# Altium PCB encoder-layout.PcbDoc
Units mil, origin at the board's own origin, x right, y up, seen from the top; angles counter-clockwise.
Board outline 1220.47 x 1233.89 mil, 2 copper layers (Top Layer, Bottom Layer); 16 components, 13 nets, 64 pads, 19 vias.
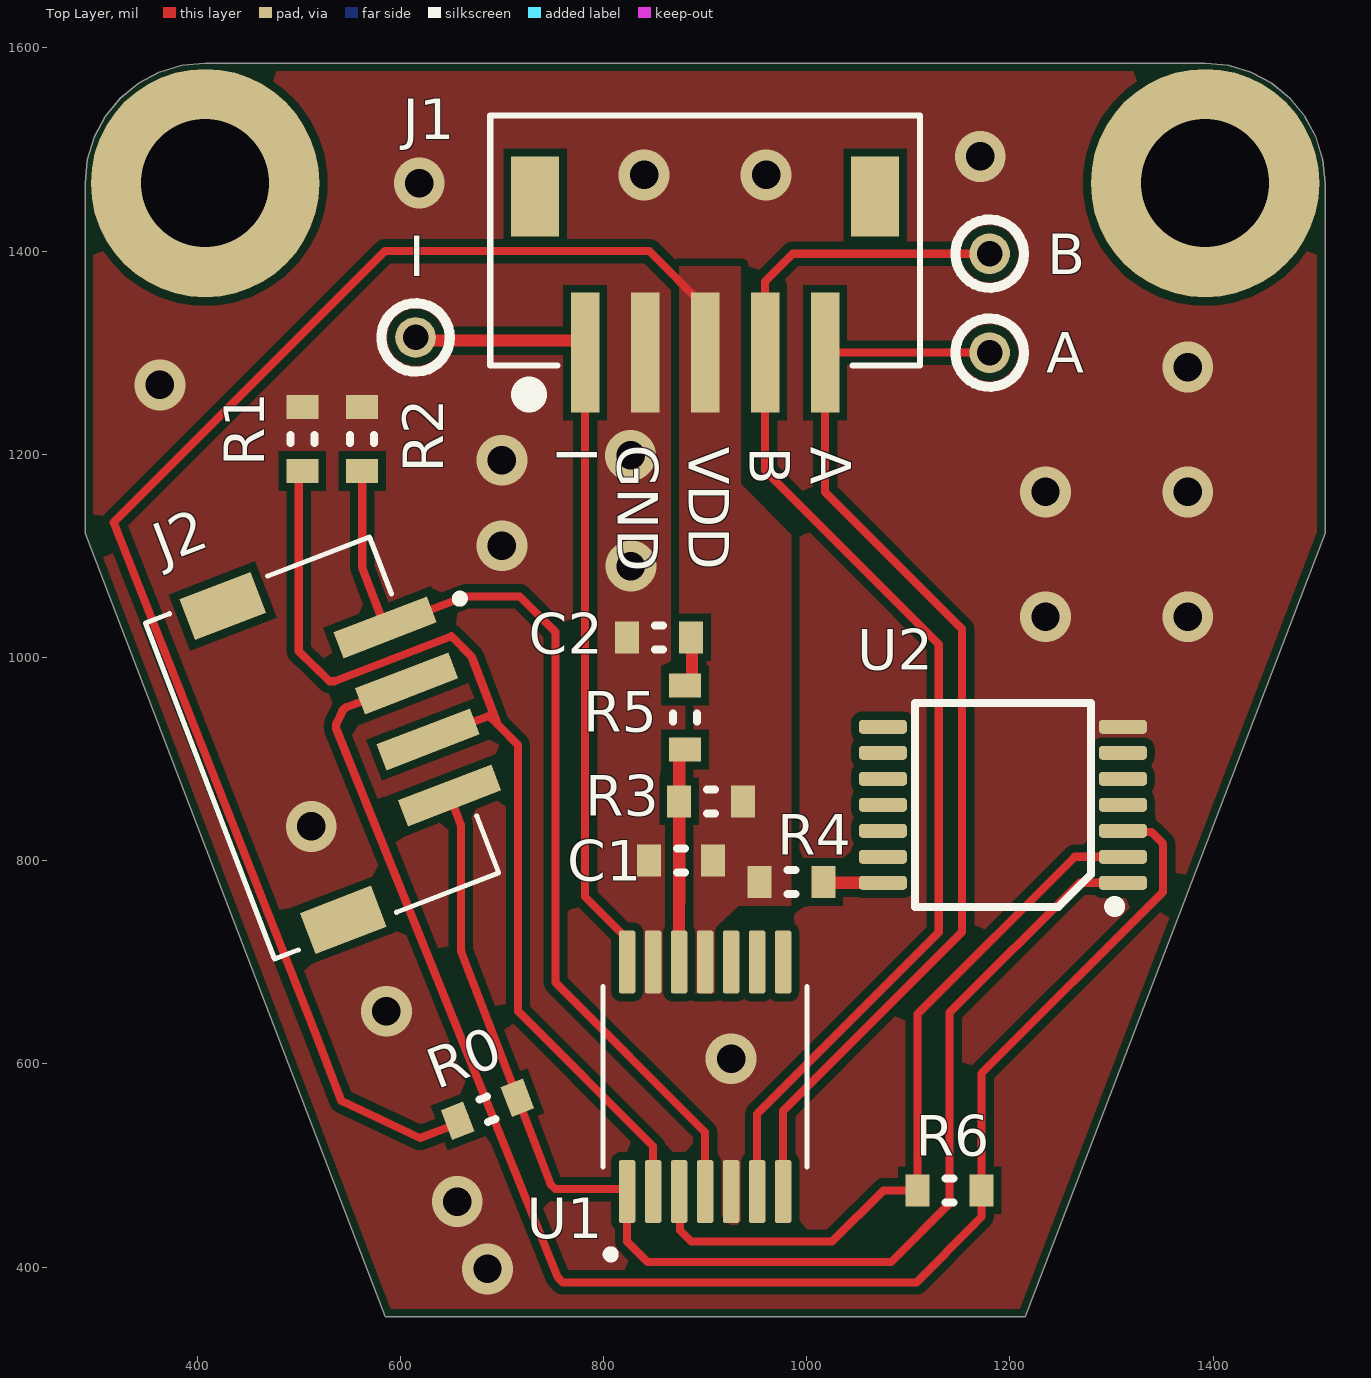
[diagram p0: Top Layer view]
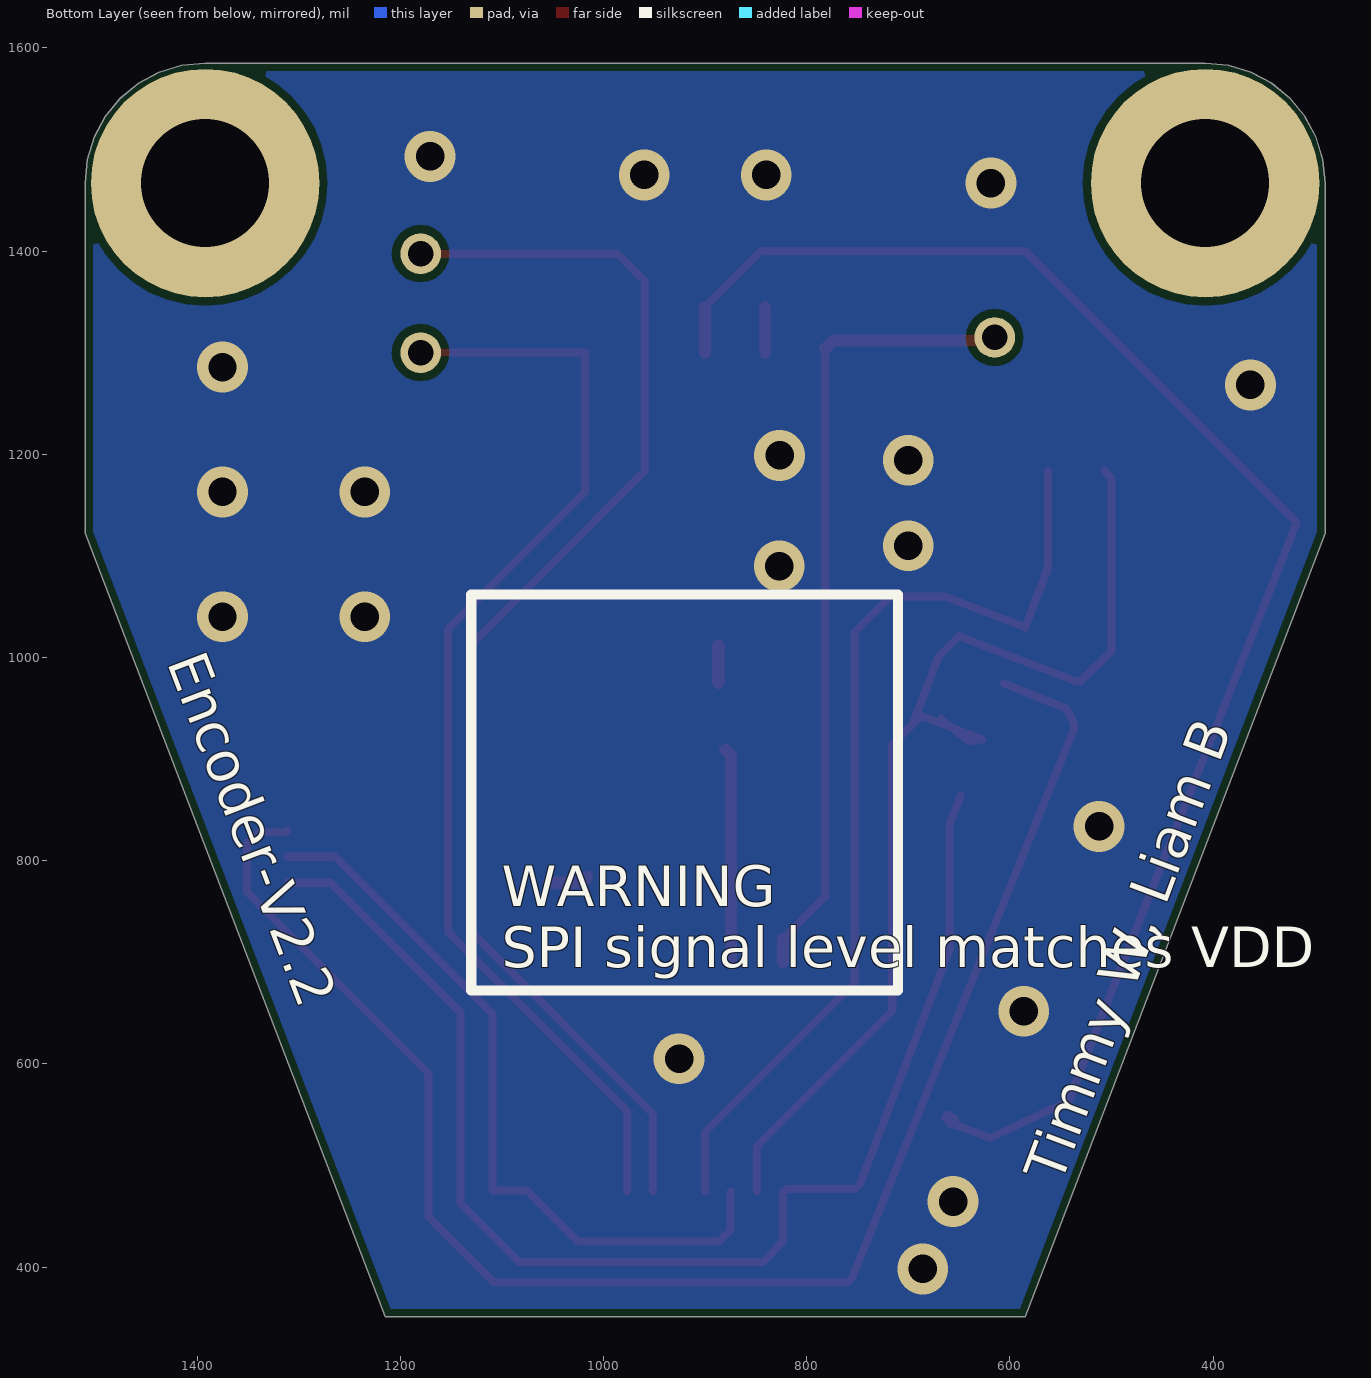
[diagram p1: Bottom Layer view, seen from below]

## Layer stack, top to bottom
Top Solder: solder mask 0.4, Solder Resist, Dk 3.5
Top Layer: signal copper 1.4
Dielectric 1: dielectric 12.6, FR-4, Dk 4.8
Bottom Layer: signal copper 1.4
Bottom Solder: solder mask 0.4, Solder Resist, Dk 3.5

## Board outline
407.87,1585 384.83,1582.73 362.68,1576.01 342.26,1565.09 324.36,1550.41 309.67,1532.51 298.75,1512.09 292.03,1489.93 289.76,1466.89 289.76,1122.31 585.04,351.11 1214.96,351.11 1510.24,1122.31 1510.24,1466.89 1507.97,1489.93 1501.25,1512.09 1490.33,1532.51 1475.64,1550.41 1457.74,1565.09 1437.32,1576.01 1415.17,1582.73 1392.13,1585

## Design rules (kind name [scope] priority, off if disabled: settings)
BoardOutlineClearance [All] p1: gap=7.87 ignorepadtopadclearanceinfootprint=FALSE except(15.75: Arc-SplitBarrior Arc-SplitContinuation Track-SplitBarrior Track-SplitContinuation SMDPad-SplitBarrior SMDPad-SplitContinuation THPad-SplitBarrior THPad-SplitContinuation Via-SplitBarrior Via-SplitContinuation Fill-SplitBarrior Fill-SplitContinuation Poly-SplitBarrior Poly-SplitContinuation Region-SplitBarrior Region-SplitContinuation Text-SplitBarrior Text-SplitContinuation)
Clearance "Clearance Bottom Layer" [OnLayer('Bottom Layer')] p1: gap=8 ignorepadtopadclearanceinfootprint=TRUE except(10: Arc-Text Track-Text SMDPad-Text THPad-Text Via-Text Fill-Text Poly-Text Region-Text Text-Text)
Clearance "Clearance Top Layer" [OnLayer('Top Layer')] p2: gap=8 ignorepadtopadclearanceinfootprint=TRUE except(10: Arc-Text Track-Text SMDPad-Text THPad-Text Via-Text Fill-Text Poly-Text Region-Text Text-Text)
Clearance [All] p3: gap=7.87 ignorepadtopadclearanceinfootprint=TRUE except(3.5: Arc-Arc Arc-Track Arc-SMDPad Track-Track Track-SMDPad SMDPad-SMDPad; 5: Arc-Via Track-Via SMDPad-Via THPad-Via Via-Via; 10: Arc-Text Track-Text SMDPad-Text THPad-Text Via-Text Fill-Text Poly-Text Region-Text Text-Text)
HoleSize [All] p1: absolutevalues=TRUE maxlimit=248.03 minlimit=7.87 maxpercent=80.000 minpercent=20.000
MinimumAnnularRing [All] p1: minimumring=3
MinimumSolderMaskSliver [All] p1: minsoldermaskwidth=3.94
PolygonConnect "GND Pour" [All vs IsNamedPolygon('GND_L01_P049')] p1: connectstyle=Direct reliefconductorwidth=10 reliefentries=4 polygonreliefangle="90 Angle" airgapwidth=10
PolygonConnect 5V_3V3_connection [All vs IsNamedPolygon('Top Layer-5V_3v3_Sel')] p2: thpad.connectstyle=Direct thpad.reliefconductorwidth=10 thpad.reliefentries=4 thpad.polygonreliefangle="90 Angle" thpad.airgapwidth=10 smdpad.connectstyle=Direct smdpad.reliefconductorwidth=10 smdpad.reliefentries=4 smdpad.polygonreliefangle="90 Angle" smdpad.airgapwidth=10 via.connectstyle=Relief via.reliefconductorwidth=10 via.reliefentries=4 via.polygonreliefangle="90 Angle" via.airgapwidth=10
PolygonConnect PolygonConnect_1 [All] p3: thpad.connectstyle=Relief thpad.reliefconductorwidth=20 thpad.reliefentries=4 thpad.polygonreliefangle="90 Angle" thpad.airgapwidth=10 smdpad.connectstyle=Relief smdpad.reliefconductorwidth=20 smdpad.reliefentries=4 smdpad.polygonreliefangle="90 Angle" smdpad.airgapwidth=10 via.connectstyle=Direct via.reliefconductorwidth=20 via.reliefentries=4 via.polygonreliefangle="90 Angle" via.airgapwidth=10
RoomDefinition encoder [InComponentClass('encoder')] p1: confinementstyle=ConfineIn formatcopy=TRUE lockcomponents=FALSE outline 1555,410 2210,410 2210,745 1555,745
RoutingCorners [All] p1: cornerstyle=Round minsetback=100 maxsetback=100
RoutingVias [All] p1: holewidth=19.68 width=39.37 viastyle="Through Hole" minholewidth=7.87 minwidth=17.72 maxholewidth=39.37 maxwidth=78.74
SilkToSilkClearance [All] p1: silktosilkclearance=3.94
SilkToSolderMaskClearance [IsPad] p1: minsilkscreentomaskgap=3.94 clearancetoexposedcopper=TRUE
SolderMaskExpansion [All] p1: expansion=4 istentingtop=FALSE
Width [All] p1: maxlimit=100 minlimit=3.5 preferedwidth=15
25 further rules are at their usual default settings.

## Components (designator, comment, footprint, x,y, rotation, side; value= is the part's Value field where it differs from the comment)
A "Test Point (Via)" TP 1180,1300 r0 top
B "Test Point (Via)" TP 1180,1397.43 r90 top
C1 "0.1uF 16V" 0603#1 876.5,800 r180 top value=0.10uF
C2 "1.0uF 16V" 0603#1 854.68,1019.9 r180 top value=1.0uF
I "Test Point (Via)" TP 615,1315 r90 top
J1 "S5B-ZR-SM4A-TF (LF) (SN)" JST_S5B-ZR-SM4A-TF 781.89,1300 r0 top locked
J2 "CN 4POS JST ZR RA" JST_S4B-ZR-SM4A-TF(LF)(SN) 616.75,946.95 r291 top locked
R0 "10k" 0603#2 685.8,555.25 r21 top
R1 "4.7k" 0603#2 503.57,1215 r90 top
R2 "4.7k" 0603#2 562.47,1215 r90 top
R3 "JUMPER" 0603#1 905.99,858.44 r180 top value=0
R4 "JUMPER" 0603#1 984.84,779.12 r180 top value=0
R5 "JUMPER" 0603#1 880.28,940.83 r90 top value=0
R6 "JUMPER" 0603#1 1140.71,475.55 r0 top value=0
U1 "AS5047U" AS5047U 900,587.33 r90 top locked
U2 "Tri-State Buffer" 14-TSSOP 1193.08,855 r180 top

## Footprints (in the part's own frame and the unit in brackets; to place one, negate y for a bottom-side part, rotate by r counter-clockwise, add the part's x,y. Pads: shape width x height; smd on the part's side, far side on the other; paste and mask are expansions set on the pad)
14-TSSOP [mm]
  rrect50% 1.2x0.35 smd mask+0.07: 1(-3,1.95) 2(-3,1.3) 3(-3,0.65) 4(-3,0) 5(-3,-0.65) 6(-3,-1.3) 7(-3,-1.95) 8(3,-1.95) 9(3,-1.3) 10(3,-0.65) 11(3,0) 12(3,0.65) 13(3,1.3) 14(3,1.95)
  silkscreen extent -2.81,-2.55 2.2,2.55, body extent -3.2,-2.5 3.2,2.5, height 1.13
0603#1 [mm] "Chip Resistor, 2-Leads, Body 1.60x0.80mm, IPC High Density"
  rect 0.6x0.8 smd mask+0.1: 1(-0.8,0) 2(0.8,0)
  silkscreen extent -0.1,-0.3 0.1,0.3, body extent -0.8,-0.4 0.8,0.4, height 0.6
0603#2 [mm] "Chip Resistor, 2-Leads, Body 1.60x0.80mm, IPC High Density"
  rect 0.6x0.8 smd: 1(-0.8,0) 2(0.8,0)
  silkscreen extent -0.1,-0.3 0.1,0.3, body extent -0.8,-0.4 0.8,0.4, height 0.6
AS5047U [mm]
  rrect25% 1.57x0.41 smd: 1(-2.87,1.95) 2(-2.87,1.3) 3(-2.87,0.65) 4(-2.87,0) 5(-2.87,-0.65) 6(-2.87,-1.3) 7(-2.87,-1.95) 8(2.87,-1.95) 9(2.87,-1.3) 10(2.87,-0.65) 11(2.87,0) 12(2.87,0.65) 13(2.87,1.3) 14(2.87,1.95)
  silkscreen extent -4.54,-2.55 2.25,2.55
JST_S4B-ZR-SM4A-TF(LF)(SN) [mm]
  rect 0.7x2.5 smd: 1(-2.25,0) 2(-0.75,0) 3(0.75,0) 4(2.25,0)
  rect 1.1x1.9 smd: S1(-4.2,-3.6) S2(4.2,-3.6)
  silkscreen extent -4.5,-5.55 4.5,2.1, body extent -4.53,-5.59 4.47,0.91, height 3.7
JST_S5B-ZR-SM4A-TF [mil]
  rect 28x118 smd paste+0: 1(0,0) 2(59.06,0) 3(118.11,0) 4(177.17,0) 5(236.22,0)
  rect 47x79 smd: 6(-49.21,153.62) 7(285.43,153.62)
  silkscreen extent -93,-41 330,233, body extent -88,-28 325,228, height 146
TP [mil] "Test point (40mil Standard)"
  round 40 hole 25: 1(0,0)

## Part data
C1: library part "CAP 0.10uF 16V", "Default Symbol for Capacitors", Rating=16V, Temperature Coefficient=X5R, Tolerance=10%, Part Number="CAP 0.10uF 16V"
C2: library part "CAP 1.0uF 16V", "Default Symbol for Capacitors", Rating=16V, Temperature Coefficient=X5R, Tolerance=10%, Part Number="CAP 1.0uF 16V"
J1: library part "CN 5POS JST ZR RA", "Connector Header Surface Mount, Right Angle 5 position 0.059\" (1.50mm)", Manufacturer Part Number 1=S5B-ZR-SM4A-TF, Supplier Part Number 1=455-1696-1-ND, Part Number="CN 5POS JST ZR RA", Pin Count=5, Supplier 1=Digi-Key, Supplier URL 1=https://www.digikey.ca/en/products/detail/jst-sales-america-inc/S5B-ZR-SM4A-TF-LF-SN/926603?s=N4IgTCBcDaICwFYEFoCMA2AnOtyByAIiALoC%2BQA
J2: "Connector Header Surface Mount, Right Angle 4 position 0.059 (1.50mm)", Package=None, Supplier Part Number 1=455-1695-1-ND, Arrow_Electronics-Purchase-URL=https://snapeda.com/shop?store=Arrow+Electronics&id=449060, Availability=Unavailable, MF="JST Sales", MP=S4B-ZR-SM4A-TF(LF)(SN), Part Number="CN 4POS JST ZR RA", Pin Count=4, Price=None, SnapEDA_Link=https://www.snapeda.com/parts/S4B-ZR-SM4A-TF(LF)(SN)/JST%20Sales%20America%20Inc./view-part/449060/?ref=snap, Supplier 1=Digi-Key, Supplier URL 1=https://www.digikey.ca/en/products/detail/jst-sales-america-inc/S4B-ZR-SM4A-TF-LF-SN/926602?s=N4IgTCBcDaIMoBYBCBaAWgJRXAsgggigCoBiAFADIkCUZcActSALoC%2BQA
R0: library part "RES 10k 1/8W - 1%", "Default Resistor Symbol", Manufacturer Part Number 1=ERJ-H3GJ103V, Manufacturer Part Number 2=RMCF0805JT10K0, Package=0805, Power (Watts)=0.125W, Supplier Part Number 1=10-ERJ-H3GJ103VCT-ND, Tolerance=5%, Part Number="RES 10k 1/8W - 1%", Supplier 1=Digi-Key, Supplier 2=Digi-Key, Supplier Part Number 2=RMCF0805JT10K0CT-ND, Supplier URL 1=https://www.digikey.ca/en/products/detail/panasonic-electronic-components/ERJ-H3GJ103V/13877876?s=N4IgTCBcDaIIwAYC0BRASgKSQCQMwHENFcA1AYQBUkA5AERAF0BfIA, Supplier URL 2=https://www.digikey.ca/en/products/detail/stackpole-electronics-inc/RMCF0805JT10K0/1757762?s=N4IgTCBcDaIEoFkDCAxADADjQVgFIBUBGNAaTSXxAF0BfIA, Tolerance 2=5%
R1 R2: library part "RES 4.7k 1/8W - 1%", "Default Resistor Symbol", Manufacturer Part Number 1=RMCF0603FT4K70, Package=0805, Power (Watts)=0.125W, Supplier Part Number 1=RMCF0603FT4K70CT-ND, Tolerance=1%, Part Number="RES 4.7k 1/8W - 1%", Supplier 1=Digi-Key, Supplier URL 1=https://www.digikey.ca/en/products/detail/stackpole-electronics-inc/RMCF0603FT4K70/1760998
R3 R4 R5 R6: library part "RES 0 JUMPER", "RES SMD 0 OHM JUMPER GENERIC 0805", Manufacturer Part Number 1=RK73Z1JTTD, Package=0805, Supplier Part Number 1=2019-RK73Z1JTTDCT-ND, Tolerance=N/A, Part Number="RES 0 JUMPER", Supplier 1=Digi-Key, Supplier URL 1=https://www.digikey.ca/en/products/detail/koa-speer-electronics-inc/RK73Z1JTTD/9845478
U1: "14-Bit On-Axis Magnetic Rotary Position Sensor with Up to 14-Bit Binary Incremental Pulse Count", Supplier Part Number 1=2009466, Supplier 1=RSComponents
U2: library part SN74LVC125APWR, "Buffer, Non-Inverting 4 Element 1 Bit per Element 3-State Output 14-TSSOP", Supplier Part Number 1=296-1222-1-ND, Manufacturer Part Number 1=SN74LVC125APWR, Part Number=SN74LVC125APWR, Supplier 1=Digi-Key, Supplier URL 1=https://www.digikey.ca/en/products/detail/texas-instruments/SN74LVC125APWR/276865
A B I: Part Number="Test Point (Via)"

## Free pads (board coordinates)
  round 225 hole 125.98: 1(407.87,1466.89) 1(1392.13,1466.89)

## Via types
v1: diameter 50, hole 28, Top Layer to Bottom Layer, 19 vias

## Nets (pads, with @x,y where several pads share a name; then routed paths per layer and width w, separated by ;. In a path a pad name is that pad's centre, name@x,y a point inside that pad or via, vN(x,y) a via of type N, cw(c..) or ccw(c..) an arc to the next point about the centre after c; other vN are vias at no path point)
5V_3v3_Sel: C1.1 J1.3 R0.1 R3.1 R4.2 U1.11 | length 1511.9
  Top Layer w8: R0.1@661.48,543.22 619.39,527.06 541.97,563.62 515.1,633.17 317.83,1132.83 585,1400 845,1400 J1.3@900,1345
  Top Layer w12: R0.1@657.08,541.93 656,544.74 R0.1@661.19,547.43 ; J1.3 J1.3@900,1345
A: A.1 J1.5 U1.7 | length 1116.4
  Top Layer w8: U1.7 976.77,497.17 976.77,553.77 1152.94,729.94 1152.94,1027.97 1018.11,1162.81 J1.5 A.1
B: B.1 J1.4 U1.6 | length 1275.8
  Top Layer w8: U1.6 952.39,475.55 951.18,476.75 951.18,550.8 1130,729.62 1130,1012.92 1060.31,1082.61 959.06,1183.87 J1.4 959.06,1369.98 986.51,1397.43 1162.33,1397.43 B.1@1176.21,1383.55
CSn: J2.4 R0.2 U1.1 U2.1 | length 1289.5
  Top Layer w8: J2.4 652,855.12 659.56,835.42 659.56,711.5 660.09,710.12 710.99,577.5 R0.2 719.41,555.57 747.93,481.28 749.13,480.07 752.48,476.73 819.16,476.73 U1.1 823.23,425 843.23,405 1083.19,405 1140.71,462.51 1140.71,650.43 1268.51,778.23 U2.1
GND: C1.2 C2.2 J1.2 R1.2 R2.2 U1.5 U1.13 U2.7 | length 45
  Top Layer w12: J1.2 J1.2@840.94,1345
  other v1: 685.8,398.24 656,464.49 925.59,605 586.36,651.88 512.24,833.75 1235,1040 1375,1040 826.94,1090 700,1110 1235,1162.93 1375,1162.93 700,1194.04 826.67,1198.87 363.33,1268.31 1375,1285.86 618.69,1466.89 839.93,1475 960,1475 1170.75,1493.12
I: I.1 J1.1 U1.14 | length 787
  Top Layer w8: J1.1 781.89,764.5 U1.14@823.23,723.16
  Top Layer w12: I.1@615,1311.9 773.89,1311.9 J1.1@781.89,1303.9 ; U1.14 U1.14@823.23,723.16
MISO: R6.1 U1.3 U2.2 | length 737.8
  Top Layer w8: U1.3 875.1,473.65 875.1,436.26 886.36,425 1025,425 1075.55,475.55 R6.1 1109.21,649.21 1263.82,803.82 U2.2
MOSI: J2.1 R2.1 U1.4 | length 957.6
  Top Layer w8: R2.1 562.47,1089.82 563,1086.95 581.5,1038.78 J2.1 627.21,1045.85 664.46,1060.15 717.58,1060.15 752.76,1024.97 752.76,679.95 900,532.72 U1.4
NetC2_1: C2.1 R5.2 | length 36.4
  Top Layer w12: R5.2@887.11,975.22 C2.1@887.11,1011.57
NetR4_1: R4.1 U2.14 | length 41.1
  Top Layer w12: R4.1@1016.34,784.29 1016.34,782.91 1021.02,778.23 U2.14@1054.1,778.23
SCLK: J2.3 R1.1 U1.2 | length 1095.2
  Top Layer w8: R1.1@506.88,1183.5 500,1176.63 500,1006.15 502.34,1003.81 ccw(c508,1009.47) 502.39,1003.77 528.08,978.91 530.41,976.65 535.13,976.65 650.28,1020.86 670.02,1001.11 695.13,935.69 695.78,934.01 ; J2.3@667.96,939.69 667.63,939.26 666.86,938.25 J2.3@657.22,930.86 ; 694.39,935.41 687.36,942.43 669.54,935.58 J2.3@657.22,930.86 ; 696.34,933.45 715.82,913.98 715.82,651.88 848.82,518.88 U1.2 ; J2.3@657.22,930.86 J2.3 636.77,918.13 637.3,918.07 640.54,918.07 J2.3@657.22,930.86
TRI_MISO: J2.2 R6.2 U2.3 | length 1602.6
  Top Layer w8: J2.2 564.21,957.64 547.04,951.05 ccw(c549.91,943.58) 542.64,946.91 537.35,935.36 ccw(c544.62,932.03) 537.2,929.06 755.15,389.69 759.84,385 1107.87,385 1166.3,443.43 1166.3,443.66 1172.2,449.57 R6.2 1172.2,590.76 1350.78,769.34 1350.78,816.73 1339.38,828.13 1312.47,828.13 U2.3
VDD3V3: R3.2 R5.1 U1.12 | length 211.4
  Top Layer w12: U1.12 874.41,759.36 874.49,759.44 874.49,903.55 R5.1
pads on no net: J1.6 J1.7 J2.S1 J2.S2 U1.8 U1.9 U1.10 U2.4 U2.5 U2.6 U2.8 U2.9 U2.10 U2.11 U2.12 U2.13

## Polygon pours and split planes (outlines as drawn)
GND on Top Layer "GND_L01_P049" (solid, pour order 49): 1621.72,335 295,335 215,335 215,445 215,1640 1590,1640 1629.16,1640
5V_3v3_Sel on Top Layer "Top Layer-5V_3v3_Sel" (solid, pour order 48): 888.75,669.42 912.54,669.42 912.54,736.58 933.24,755.46 984.84,755.46 984.84,779.12 984.84,1120.61 935,1170.86 935,1385 874.4,1385 874.4,1012.73 888.75,1012.73
GND on Bottom Layer "GND_L02_P001" (solid, pour order 1): 0,1695 0,155 2280,155 2280,1725

## Silkscreen, mask and mechanical layers (free items; w line width, h text height)
Top Overlay:
  circle w10: c1180,1300 r33.7
  circle w10: c615,1315 r33.7
  circle w10: c1180,1397.43 r33.7
  text "GND" at 814.2,1209.16 h40 r270
  text "I" at 754,1207.43 h40 r270
  text "VDD" at 884,1207.43 h40 r270
  text "B" at 944,1207.43 h40 r270
  text "A" at 1004,1207.43 h40 r270
Bottom Overlay:
  lines w10: 710.15,672.14 1130.15,672.14 1130.15,1062.14 710.15,1062.14 710.15,672.14
  text "Encoder-V2.2" at 1429.66,995.4 h40 r69
  text "WARNING / SPI signal level matches VDD" at 1100,695 h40
  text "Timmy W, Liam B" at 550,480 h40 r290.59
Mechanical 1:
  the board outline again, w10

## Dimensions
407.87,1466.89 to 732.68,1453.62 on Dimensions
1067.32,1453.62 to 1392.13,1466.89 on Dimensions
407.87,1466.89 to 1392.13,1466.89 on Dimensions
1392.13,1466.89 to 900,587.33 on Dimensions